# Altium PCB ultrasonic_revB.PcbDoc
Units mil, origin at the board's own origin, x right, y up, seen from the top; angles counter-clockwise.
Board outline 1840 x 1195 mil, 4 copper layers (Top Layer, Mid-Layer 1, Mid-Layer 2, Bottom Layer); 68 components, 51 nets, 270 pads, 100 vias.
Unrouted connection lines stored in the file: 2.
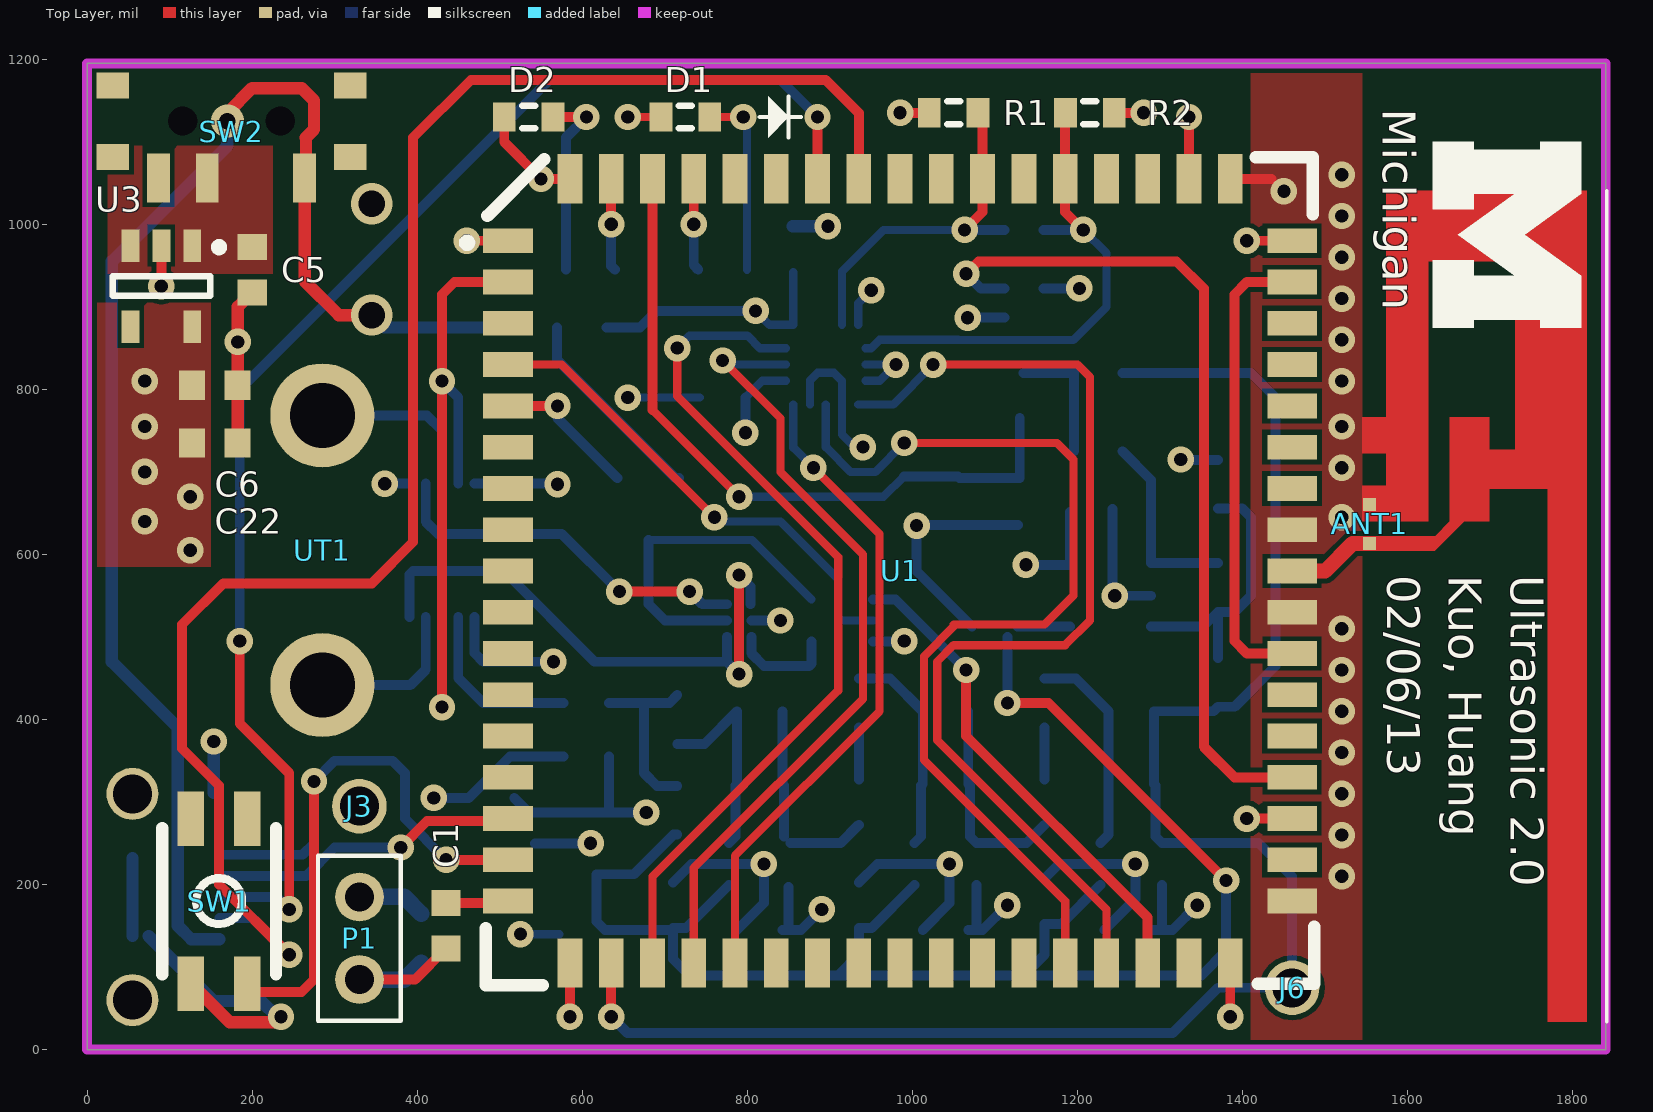
[diagram p0: Top Layer view]
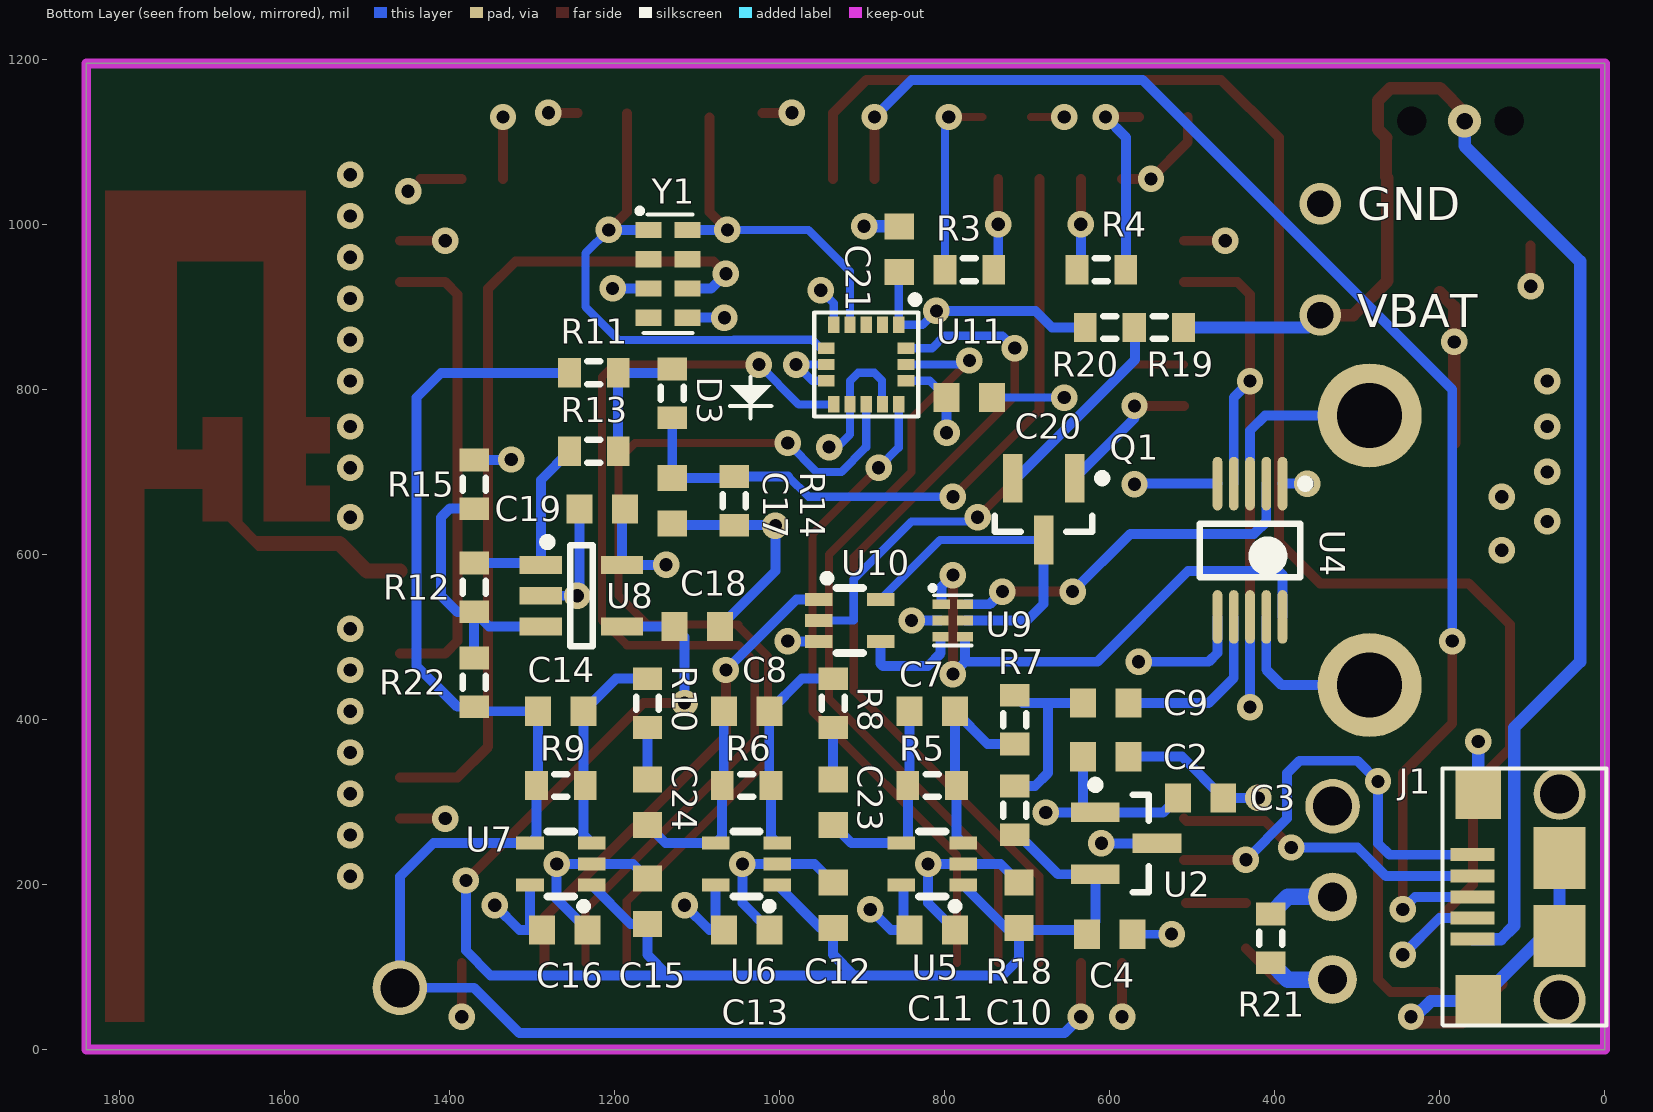
[diagram p1: Bottom Layer view, seen from below]
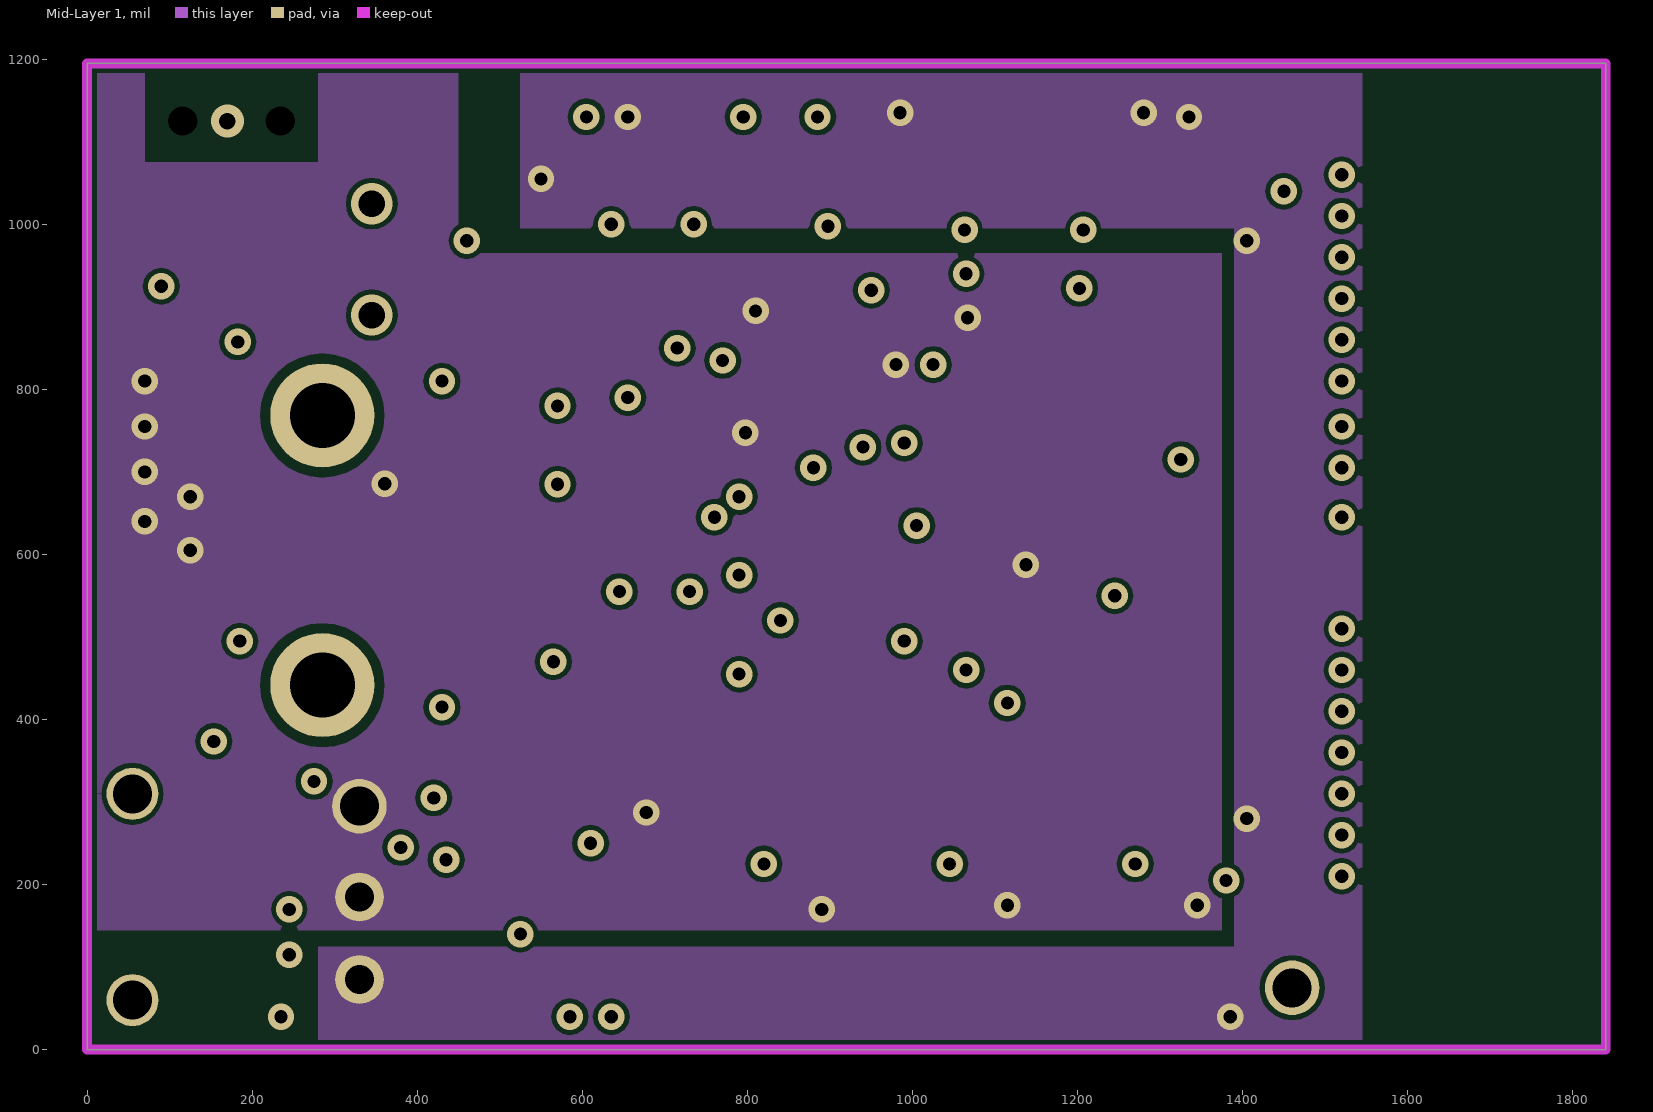
[diagram p2: Mid-Layer 1]
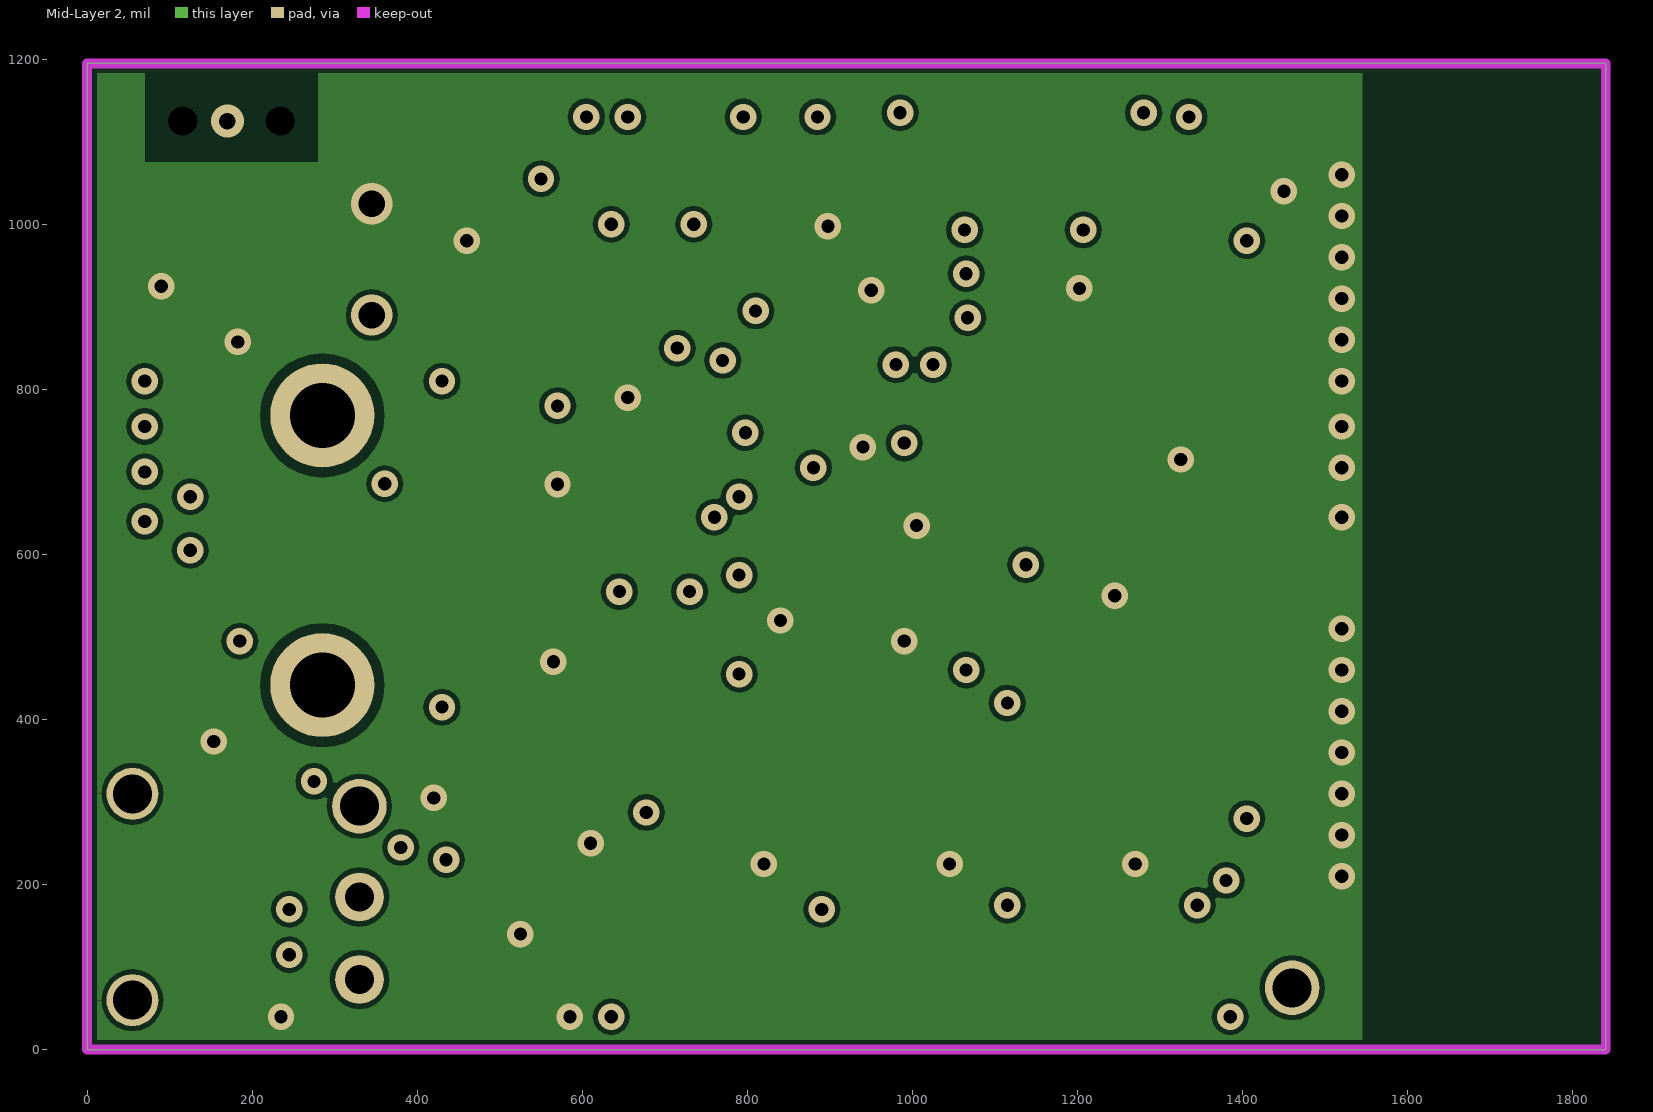
[diagram p3: Mid-Layer 2]

## Layer stack, top to bottom
Top Layer: signal copper 1.4
Dielectric: core 12.6, FR-4, Dk 4.8
Mid-Layer 1: signal copper 1.4
Dielectric: prepreg 12.6, FR-4, Dk 4.8
Mid-Layer 2: signal copper 1.4
Dielectric: core 12.6, FR-4, Dk 4.8
Bottom Layer: signal copper 1.4

## Board outline
0,0 1840,0 1840,1195 0,1195

## Design rules (kind name [scope] priority, off if disabled: settings)
Clearance "Clearance~Sunstone Circuits" [All] p1: gap=6 // Sunstone Circuits Minimum Clearance Rule (MLB~4&6 Layer Designs)
HoleSize "HoleSize~Sunstone Circuits" [All] p1: absolutevalues=TRUE maxlimit=251 minlimit=8 maxpercent=80.000 minpercent=20.000 // Sunstone Circuits Hole Size Rule (MLB~4&6 Layer Designs)
HoleSize Testpoint [All] p2: absolutevalues=TRUE maxlimit=100 minlimit=1 maxpercent=80.000 minpercent=20.000
HoleSize TestPointUsage [All] p3: absolutevalues=TRUE maxlimit=100 minlimit=1 maxpercent=80.000 minpercent=20.000
MinimumAnnularRing "MinimumAnnularRing~Sunstone Circuits" [All] p1: minimumring=7 // Sunstone Circuits Minimum Annular Ring (MLB~4&6 Layer Designs)
PlaneClearance "PlaneClearance~Sunstone Circuits" [All] p1: clearance=12 // Sunstone Circuits Power Plane Clearance Rule (MLB~4&6 Layer Designs)
PlaneConnect "PlaneConnect~Sunstone Circuits" [All] p1: planeconnectstyle=Relief reliefexpansion=10 reliefentries=4 reliefconductorwidth=8 reliefairgap=10 // Sunstone Circuits Power Plane Connect Rule (MLB~4&6 Layer Designs)
PolygonConnect "PolygonConnect~Sunstone Circuits" [All] p1: connectstyle=Direct reliefconductorwidth=8 reliefentries=4 polygonreliefangle="90 Angle" airgapwidth=10 // Sunstone Circuits Polygon Connect Style (MLB~4&6 Layer Designs)
RoomDefinition U_power [InComponentClass('U_power')] p1: confinementstyle=ConfineIn formatcopy=TRUE lockcomponents=FALSE outline -1.39,1013.57 -1.39,1241.3 351.39,1241.3 351.39,388.62 664.21,388.62 664.21,340.71 668.74,340.71 668.74,169.13 659.21,169.13 659.21,106.38 540.79,106.38 540.79,169.13 491.26,169.13 491.26,235.1 270.4,235.1 270.4,701.38 95.79,701.38 95.79,836.26 9.13,836.26 9.13,1013.57
RoomDefinition U_epic [InComponentClass('U_epic')] p2: confinementstyle=ConfineIn formatcopy=TRUE lockcomponents=FALSE outline -14.59,13.58 -14.59,356.42 440.47,356.42 440.47,1098.48 475.79,1098.48 475.79,1163.62 990.79,1163.62 990.79,1168.62 1109.21,1168.62 1274.21,1168.62 1274.21,1098.48 1504.47,1098.48 1504.47,1052.76 1853.03,1052.76 1853.03,21.73 209.23,21.73 209.23,13.58
RoomDefinition U_accelerometer [InComponentClass('U_accelerometer')] p3: confinementstyle=ConfineIn formatcopy=TRUE lockcomponents=FALSE outline 710.79,756.38 710.79,823.62 817.01,823.62 817.01,927.68 821.38,927.68 821.38,1029.21 888.62,1029.21 888.62,927.68 970.49,927.68 970.49,754.51 817.01,754.51 817.01,756.38
RoomDefinition U_ultrasonic_tx [InComponentClass('U_ultrasonic_tx')] p4 off: confinementstyle=ConfineIn formatcopy=TRUE lockcomponents=FALSE outline 589.29,566.26 589.29,743.74 760.87,743.74 760.87,590.12 982.13,590.12 982.13,465.63 847.87,465.63 847.87,477.13 752.59,477.13 752.59,566.26
RoomDefinition U_ultrasonic_rx [InComponentClass('U_ultrasonic_rx')] p5 off: confinementstyle=ConfineIn formatcopy=TRUE lockcomponents=FALSE outline 545.79,386.38 545.79,453.62 681.38,453.62 681.38,459.21 1086.38,459.21 1086.38,854.21 1153.62,854.21 1153.62,853.62 1284.21,853.62 1284.21,759.21 1358.62,759.21 1358.62,604.21 1398.62,604.21 1398.62,134.9 1520,134.9 1520,15.1 1400.4,15.1 1400.4,111.38 755.79,111.38 755.79,115.79 676.38,115.79 676.38,386.38
RoomDefinition U_ultrasonic [InComponentClass('U_ultrasonic')] p6 off: confinementstyle=ConfineIn formatcopy=TRUE lockcomponents=FALSE outline 19.59,341.12 19.59,870.91 550.4,870.91 550.4,341.12
RoutingVias "RoutingVias~Sunstone Circuits" [All] p1: holewidth=16 width=30 viastyle="Through Hole" minholewidth=8 minwidth=24 maxholewidth=20 maxwidth=40 // Sunstone Circuits Routing Vias Rule (MLB~4&6 Layer Designs)
ShortCircuit "ShortCircuit~Sunstone Circuits" [All] p1: allowed=FALSE // Sunstone Circuits Short Circuit Rule~Do Not Allow (MLB~4&6 Layer Designs)
SilkscreenOverComponentPads [All] p1: minsilkscreentomaskgap=10
SolderMaskExpansion "Tent Vias" [isVia] p1: expansion=-20 // Tent Vias
SolderMaskExpansion "SolderMaskExpansion~Sunstone Circuits" [All] p2: expansion=3 // Sunstone Circuits Solder Mask Expansion Rule (MLB~4&6 Layer Designs)
ViasUnderSMD "ViasUnderSMD~Sunstone Circuits" [All] p1: allowed=FALSE // Sunstone Circuits Vias Under SMD~Do Not Allow (MLB~4&6 Layer Designs)
Width "Width~Sunstone Circuits" [All] p1: maxlimit=100 minlimit=6 preferedwidth=10 // Sunstone Circuits Minimum Width Rule (MLB~4&6 Layer Designs)
23 further rules are at their usual default settings.

## Classes and differential pairs
component class U_accelerometer: C20 C21 U11
component class U_epic: ANT1 C1 D1 D2 J1 P1 R1 R2 R3 R4 R21 SW1 U1 Y1
component class U_power: C2 C3 C4 C5 C6 C22 J3 SW2 U2 U3
component class U_ultrasonic_rx: C7 C8 C9 C10 C11 C12 C13 C14 C15 C16 C17 C18 C19 C23 C24 D3 J6 R5 R6 R7 R8 R9 R10 R11 R12 R13 R14 R15 R18 R22 U5 U6 U7 U8
component class U_ultrasonic_tx: Q1 R19 R20 U9 U10
component class U_ultrasonic: U4 UT1

## Components (designator, comment, footprint, x,y, rotation, side; value= is the part's Value field where it differs from the comment)
ANT1 "2.4GHz PCB Antenna" "Inverted F Antenna" 1545,640 r270 top
C1 "Cap Semi" 1608[0603] 435,150 r90 top
C2 "Cap Semi" 1608[0603] 605,355 r0 bottom
C3 "Cap Semi" 1608[0603] 490,305 r0 bottom
C4 "Cap Semi" 1608[0603] 600,140 r0 bottom
C5 "Cap Semi" 1608[0603] 200,945 r90 top
C6 "Cap Semi" 1608[0603] 155,805 r180 top
C7 "Cap Semi" 1608[0603] 815,410 r180 bottom
C8 "Cap Semi" 1608[0603] 1040,410 r180 bottom
C9 "Cap Semi" 1608[0603] 605,420 r180 bottom
C10 "Cap Semi" 1608[0603] 710,175 r270 bottom
C11 "Cap Semi" 1608[0603] 815,145 r0 bottom
C12 "Cap Semi" 1608[0603] 935,175 r270 bottom
C13 "Cap Semi" 1608[0603] 1040,145 r0 bottom
C14 "Cap Semi" 1608[0603] 1265,410 r180 bottom
C15 "Cap Semi" 1608[0603] 1160,180 r270 bottom
C16 "Cap Semi" 1608[0603] 1260,145 r0 bottom
C17 "Cap Semi" 1608[0603] 1130,665 r270 bottom
C18 "Cap Semi" 1608[0603] 1099.84,512.6 r0 bottom
C19 "Cap Semi" 1608[0603] 1215,655 r180 bottom
C20 "Cap Semi" 1608[0603] 770,790 r0 bottom
C21 "Cap Semi" 1608[0603] 855,970 r270 bottom
C22 "Cap Semi" 1608[0603] 155,735 r180 top
C23 "Cap Semi" 1608[0603] 935,300 r90 bottom
C24 "Cap Semi" 1608[0603] 1160,300 r90 bottom
D1 "LED3" J1-0603 725,1130 r0 top
D2 "LED3" J1-0603 535,1130 r0 top
D3 "Diode" J1-0603 1130,795 r270 bottom
J1 "6 pin connector" "Micro USB" 55,185 r90 bottom
J3 "5004" TestPoint 330,295 r0 top
J6 "5004" TestPoint 1460,75 r0 top
P1 "1 x 2 header" "1x2 header" 330,135 r270 top
Q1 "ZXM61P03" SOT23-3N 680,655 r270 bottom
R1 "10K" J1-0603 1050,1135 r0 top
R2 "10K" J1-0603 1215,1135 r180 top
R3 "470" J1-0603 770,945 r0 bottom
R4 "470" J1-0603 610,945 r180 bottom
R5 "1Meg" J1-0603 815,320 r0 bottom
R6 "1Meg" J1-0603 1040,320 r0 bottom
R7 "100K" J1-0603 715,400 r270 bottom
R8 "100K" J1-0603 935,420 r90 bottom
R9 "1Meg" J1-0603 1265,320 r0 bottom
R10 "100K" J1-0603 1160,420 r90 bottom
R11 "2k" J1-0603 1225,820 r180 bottom
R12 "1.24M" J1-0603 1370,560 r270 bottom
R13 "2k" J1-0603 1225,725 r180 bottom
R14 "1Meg" J1-0603 1055,665 r90 bottom
R15 "422K" J1-0603 1370,685 r270 bottom
R18 "Res3" J1-0603 715,290 r270 bottom
R19 "Res3" J1-0603 540,875 r180 bottom
R20 "Res3" J1-0603 600,875 r0 bottom
R21 "Res3" J1-0603 405,135 r270 bottom
R22 "37.4K" J1-0603 1370,445 r90 bottom
SW1 "EVQP2" EVQP2 160,180 r270 top
SW2 "EG1218" "Slide Switch SPDT" 175,1125 r180 top
U1 "EPIC_COREA" EPIC_LCC68 985,580 r0 top locked
U2 "ISL60002" SOT23-3N 580,250 r180 bottom
U3 "ADP162" TSOT23-5 90,925 r270 top
U4 "TS3A24159" TSSOP50P490X110-10N 430,605 r270 bottom
U5 "MIC861" SC70-6 815,225 r90 bottom
U6 "MIC861" SC70-6 1040,225 r90 bottom
U7 "MIC861" SC70-6 1265,225 r90 bottom
U8 "AS1976" SOT23-5 1240,550 r180 bottom
U9 "NLX2G14" ULLGA6 790,520 r270 bottom
U10 "SN74AUP1G08" SC70-6 915,520 r270 bottom
U11 "LIS3DHTR" LGA-16 895,830 r270 bottom
UT1 "400EP250" "TRANSDUCER RECEPTICLE" 285,605 r90 top
Y1 "RV-4162-C7" RV4162 1135,940 r270 bottom

## Footprints (in the part's own frame and the unit in brackets; to place one, negate y for a bottom-side part, rotate by r counter-clockwise, add the part's x,y. Pads: shape width x height; smd on the part's side, far side on the other; paste and mask are expansions set on the pad)
"1x2 header" [mm] "1x2 header, 100 mils"
  round 1.5 hole 0.9: 1(-1.27,0) 2(1.27,0)
  silkscreen extent -2.54,-1.27 2.54,1.27, body extent -2.53,-1.26 2.53,1.26, height 8.38
1608[0603] [mm] "Chip Capacitor, Body 1.6x0.8mm, IPC High Density"
  rect 0.8x0.9 smd: 1(-0.7,0) 2(0.7,0)
  body extent -0.87,-0.48 0.87,0.48, height 1.3
EPIC_LCC68 [mil]
  rect 60x30 smd: 1(-475,400) 2(-475,350) 3(-475,300) 4(-475,250) 5(-475,200) 6(-475,150) 7(-475,100) 8(-475,50) 9(-475,0) 10(-475,-50) 11(-475,-100) 12(-475,-150) 13(-475,-200) 14(-475,-250) 15(-475,-300) 16(-475,-350) 17(-475,-400)
  rect 30x59.84 smd: 18(-400,-475) 19(-350,-475) 20(-300,-475) 21(-250,-475) 22(-200,-475) 23(-150,-475) 24(-100,-475) 25(-50,-475) 26(0,-475) 27(50,-475) 28(100,-475) 29(150,-475) 30(200,-475) 31(250,-475) 32(300,-475) 33(350,-475) 34(400,-475) 52(400,475) 53(350,475) 54(300,475) 55(250,475) 56(200,475) 57(150,475) 58(100,475) 59(50,475) 60(0,475) 61(-50,475) 62(-100,475) 63(-150,475) 64(-200,475) 65(-250,475) 66(-300,475) 67(-350,475) 68(-400,475)
  rect 59.84x30 smd: 35(475,-400) 36(475,-350) 37(475,-300) 38(475,-250) 39(475,-200) 40(475,-150) 41(475,-100) 42(475,-50) 43(475,0) 44(475,50) 45(475,100) 46(475,150) 47(475,200) 48(475,250) 49(475,300) 50(475,350) 51(475,400)
  silkscreen extent -530,-502 502,501, body extent -448,-448 448,453, height 118
EVQP2 [mm] "EVQP2 Switch"
  rect 1.68x0.81 smd: 1(-2.54,-0.87) 1(2.54,-0.87) 2(-2.54,0.87) 2(2.54,0.87)
  silkscreen extent -2.25,-1.75 2.25,1.75, body extent -2.25,-1.75 2.25,1.75, height 4
"Inverted F Antenna" [mm]
  rect 0.4x0.4 smd mask-20: GND(-0.525,0.225) SIG(0.675,0.225)
  Top Layer region: 0,0 0,2.03 -8,2.03 -8,4.7 -2.2,4.7 -2.2,3.9 -3.2,3.9 -3.2,2.69 0,2.69 0.45,2.24 0.45,0 0.91,0 0.91,2.23 0,3.14 0,3.9 -1,3.9 -1,5.7 15.4,5.7 15.4,6.91 -10.18,6.91 -10.18,0.74 -3.2,0.74 -3.2,0 -2.1,0 -2.1,0.74 -1.1,0.74 -1.1,0
  silkscreen extent -10.18,7.52 15.4,7.52
J1-0603 [mm] "Chip Resistor, Body 1.6x0.8mm, IPC High Density"
  rect 0.7x0.9 smd: 1(-0.75,0) 2(0.75,0)
  silkscreen extent -0.2,-0.35 0.2,0.35, body extent -0.85,-0.48 0.85,0.48, height 0.9
LGA-16 [mm]
  rect 0.51x0.345 smd mask+0.1: 1(-1.225,1) 2(-1.225,0.5) 3(-1.225,0) 4(-1.225,-0.5) 5(-1.225,-1) 9(1.225,-1) 10(1.225,-0.5) 11(1.225,0) 12(1.225,0.5) 13(1.225,1)
  rect 0.345x0.51 smd mask+0.1: 6(-0.5,-1.225) 7(0,-1.225) 8(0.5,-1.225) 14(0.5,1.225) 15(0,1.225) 16(-0.5,1.225)
  silkscreen extent -2.1,-1.6 1.6,1.6, body extent -1.5,-1.5 1.5,1.5, height 1
"Micro USB" [mm]
  rect 0.4x1.35 smd mask+0.1: 1(-1.3,2.675) 2(-0.65,2.675) 3(0,2.675) 4(0.65,2.675) 5(1.3,2.675)
  rect 1.6x1.4 smd mask+0.1: 6(-3.2,2.5) 6(3.2,2.5)
  rect 1.9x1.6 smd mask+0.1: 6(-1.2,0) 6(1.2,0)
  round 1.6 hole 1.2: ""(-3.175,0) ""(3.175,0)
  silkscreen extent -3.95,-1.45 3.95,3.6
RV4162 [mm] "RTC"
  rect 0.5x0.8 smd: 1(-1.35,-0.6) 2(-0.45,-0.6) 3(0.45,-0.6) 4(1.35,-0.6) 5(1.35,0.6) 6(0.45,0.6) 7(-0.45,0.6) 8(-1.35,0.6)
  silkscreen extent -1.97,-0.91 1.83,0.75, body extent -1.6,-0.75 1.6,0.75, height 0.8
SC70-6 [mm]
  rect 0.4x0.85 smd: 1(-0.65,-0.95) 2(0,-0.95) 3(0.65,-0.95) 4(0.65,0.95) 5(-0.65,0.95)
  silkscreen extent -1.4,-0.8 1,0.4, body extent -0.9,-0.6 0.9,0.6, height 0.8
"Slide Switch SPDT" [mm] "Surface mount, 3 position, right angle slide switch"
  rect 0.7x1.5 smd: 1(-2.25,1.75) 2(0.75,1.75) 3(2.25,1.75)
  rect 1x0.8 smd: ""(-3.65,-1.1) ""(-3.65,1.1) ""(3.65,-1.1) ""(3.65,1.1)
  round 0 hole 0.9: ""(-1.5,0) ""(1.5,0)
  body extent -3.35,-2.7 3.35,1.3, height 1.4
SOT23-3N [mm] "SOT23, 3-Leads, Body 2.9x1.3mm, Pitch 0.95mm, Lead Span 2.5mm, IPC Medium Density"
  rect 1.5x0.6 smd: 1(-0.95,0.95) 2(-0.95,-0.95) 3(0.95,0)
  silkscreen extent -1.07,-1.5 0.7,1.92, body extent -0.7,-1.5 0.7,1.5, height 1.1
SOT23-5 [mm] "SOT23, 5-Leads, Body 2.9x1.6mm, Pitch 0.95mm, Lead Span 2.8mm, IPC High Density"
  rect 1.3x0.55 smd: 1(-1.25,0.95) 2(-1.25,0) 3(-1.25,-0.95) 4(1.25,-0.95) 5(1.25,0.95)
  silkscreen extent -1.18,-1.55 0.35,1.77, body extent -0.67,-1.5 0.65,1.5, height 1.45
TestPoint [mm]
  round 1.68 hole 1.2: 1(0,0)
  body extent -1.26,-1.27 1.27,1.27, height 4.57
"TRANSDUCER RECEPTICLE" [mm] "Transducer with Pin Recepticle"
  round 3.2 hole 2: 1(-4.15,0) 2(4.15,0)
  body extent -6.45,-6.49 6.5,6.49, height 14
TSOT23-5 [mm] "SOT23, 6-Leads, Body 3.0x2.9mm (max), Pitch 0.95mm, IPC Medium Density"
  rect 1x0.55 smd: 1(-1.25,0.95) 2(-1.25,0) 3(-1.25,-0.95) 4(1.25,-0.95) 5(1.25,0.95)
  silkscreen extent -1.32,-1.5 0.3,1.9, body extent -0.87,-1.5 0.87,1.5, height 1
TSSOP50P490X110-10N [mm] "TSSOP, 10-Leads, Body 3.1x3.1mm (max), Pitch 0.50mm, IPC Medium Density"
  oval 1.65x0.3 smd: 1(-2.05,1) 2(-2.05,0.5) 3(-2.05,0) 4(-2.05,-0.5) 5(-2.05,-1) 6(2.05,-1) 7(2.05,-0.5) 8(2.05,0) 9(2.05,0.5) 10(2.05,1)
  silkscreen extent -2.17,-1.55 0.82,1.82, body extent -1.55,-1.55 1.55,1.55, height 1.1
ULLGA6 [mm] "ULLGA6 1.45x1.0, 0.5P  CASE 613AF"
  rect 0.3x0.53 smd: 1(-0.5,-0.355)
  rect 0.3x0.49 smd: 2(0,-0.375) 3(0.5,-0.375) 4(0.5,0.375) 5(0,0.375) 6(-0.5,0.375)
  silkscreen extent -1.02,-0.65 0.77,0.58, body extent -0.72,-0.5 0.72,0.5, height 0.4

## Part data
C1 C2 C3 C4 C5 C6 C7 C8 C9 C10 C11 C12 C13 C14 C15 C16 C17 C18 C19 C20 C21 C22 C23 C24: "Capacitor (Semiconductor SIM Model)"
D1 D2: "Typical BLUE SiC LED"
D3: "Default Diode"
J3 J6: library part TestPoint, "TEST POINT PC MINI .040\"D YELLOW"
P1: "100 mils standard header"
Q1: "30V P-CHANNEL ENHANCEMENT MODE MOSFET"
R1 R2 R3 R4 R5 R6 R7 R8 R9 R10 R11 R12 R13 R14 R15 R22: library part Res3, "Resistor"
R18 R19 R20 R21: "Resistor"
SW1: "Switch"
SW2: "Switch 3 Pos"
U1: "EPIC Core"
U2: "Precision Low Power FGA? Voltage References"
U3: "Ultralow Quiescent Current,  150 mA, CMOS Linear Regulators"
U4: "DUAL-CHANNEL 2:1 MULTIPLEXER/DEMULTIPLEXER"
U5 U6 U7: "Teeny, Ultra Low Power Op Amp"
U8: "Ultra-Low Current, 1.8V Comparators"
U9: "Dual Schmitt-Trigger  Inverter"
U10: "LOW-POWER SINGLE 2-INPUT POSITIVE-AND GATE"
U11: "MEMS digital output motion sensor"
UT1: library part Tranducer, "Air Ultrasounic Ceramic Transducers"
Y1: "Real Time Clock Module with I2C Bus"

## Via types
v1: diameter 32, hole 16, Top Layer to Bottom Layer, 97 vias
v2: diameter 50, hole 32, Top Layer to Bottom Layer, 2 vias
v3: diameter 40, hole 20, Top Layer to Bottom Layer, 1 vias

## Nets (pads, with @x,y where several pads share a name; then routed paths per layer and width w, separated by ;. In a path a pad name is that pad's centre, name@x,y a point inside that pad or via, vN(x,y) a via of type N, cw(c..) or ccw(c..) an arc to the next point about the centre after c; other vN are vias at no path point)
ACCE_ADC1: U1.20 U11.16 | length 1063.3
  Top Layer w10: U1.20 685,210 910,435 910,596.82 715,791.82 v1(715,850)
  Bottom Layer w10: v1(715,850) 730,865 800,865 815.32,849.68 U11.16
ACCE_ADC2: U1.21 U11.15 | length 963.3
  Top Layer w10: U1.21 735,220 940,425 940,600 840,700 840,765 v1(770,835)
  Bottom Layer w10: v1(770,835) v1@774.39,830.61 ; v1@775,830 U11.15
ACCE_ADC3: U1.22 U11.13 | length 792.5
  Top Layer w10: U1.22 785,235 960,410 960,625 v1(880,705)
  Bottom Layer w10: U11.13 855.63,729.37 v1(880,705)
ACCE_INT1: U1.30 U11.11 | length 1206.7
  Top Layer w10: v1(990,735) 1175,735 1195,715 1195,550 1160,515 1050,515 1050,512.63 1014,476.63 1014,351 1185,180 U1.30
  Bottom Layer w10: 895,730 U11.11 ; 896.18,730 896.18,728.82 925,700 955,700 v1(990,735)
ACCE_INT2: U1.31 U11.9 | length 1257.4
  Top Layer w10: v1(1025,830) 1200,830 1215,815 1215,520 1185,490 1050,490 1030,470 1030,375 1235,170 U1.31
  Bottom Layer w10: U11.9 976.77,781.77 v1(1025,830)
AMP1_OUT: C7.1 C23.1 R5.2 U5.4 | length 241.2
  Bottom Layer w12: R5.2@842.56,321.97 C7.1 ; 844.53,258.46 R5.2 ; U5.4 913.15,250.59 C23.1
AMP2_OUT: C8.1 C24.1 R6.2 U6.4 | length 252.4
  Bottom Layer w12: R6.2@1067.56,321.97 C8.1 ; R6.2 1069.53,258.46 U6.4 1138.15,250.59 C24.1
AMP3_OUT: C14.1 J6.1 R9.2 R11.1 R22.1 U1.19 U7.4 | length 2087.1
  Top Layer w12: v1(635,40) U1.19
  Bottom Layer w12: v1(635,40) 655,20 1315,20 1370,75 J6.1 1460,210 1419.41,250.59 U7.4 1294.53,258.46 R9.2 1292.56,321.97 C14.1 1364.53,410 R22.1 1390.47,415.47 1440,465 1440,790 1410,820 R11.1
COMP_OUT: R12.1 R13.1 U8.1 | length 228.5
  Bottom Layer w12: R13.1 1289.21,690.32 U8.1@1289.21,589.53 ; U8.1@1291.34,589.53 R12.1
GND: ANT1.GND C2.1 C3.1 C4.1 C5.1 C6.1 C10.1 C11.1 C12.1 C13.1 C15.1 C16.1 C17.2 C18.1 C19.1 C20.1 C21.1 C22.1 J1.6 R14.1 R15.1 SW1.1 U1.1 U1.18 U1.35 U1.42 U1.44 U1.52 U2.3 U3.2 U4.5 U4.6 U5.2 U6.2 U7.2 U8.2 U9.2 U10.3 U11.5 U11.10 U11.12 Y1.3 | length 2991
  Top Layer w12: v1(90,925) U3.2 ; v1(460,980) U1.1 ; v1(585,40) U1.18 ; U1.52 1435,1055
  Top Layer w15: SW1.1@125.75,80 126.14,80 172.72,33.43 228.43,33.43 v1(235,40) ; C22.1 C6.1 v1(182.56,857.44) 182.56,900 C5.1
  Bottom Layer w10: v1(525,140) C4.1 ; v1(655,790) C20.1 ; U11.12@875.91,781.77 875.91,810.91 885,820 905,820 914.68,810.32 U11.10 914.68,745.32 v1@930,730 ; U11.5 934.37,904.37 v1(950,920)
  Bottom Layer w12: v1(420,305) C3.1 512.44,355 C2.1 ; U4.6 469.37,480.63 480,470 v1(565,470) ; U4.5 569.29,685.71 v1(570,685) ; U2.3 v1(610,250) ; C10.1 732.44,225 U5.2 v1(820,225) 820,177.56 C11.1 ; U9.2 v1(840,520) ; C12.1 957.44,225 U6.2 v1(1045,225) 1045,177.56 C13.1 ; U10.3 989.41,494.41 v1(990,495) ; v1(1005,635) 1005,579.88 C18.1 ; v1@1005.47,635.47 R14.1 C17.2@1128.03,635.47 ; Y1.3 v1(1202.28,922.28) ; C15.1 1177.44,225 U7.2 v1(1270,225) 1270,182.56 C16.1 ; v1@1242.56,552.44 C19.1 ; v1(1245,550) U8.2 ; v1(1325,715) 1325.47,714.53 R15.1
  Bottom Layer w15: J1.6@55,137.76 J1.6@55,232.24 ; J1.6@74.68,137.76 153.43,59.02 210.98,59.02 230,40 v1(235,40) ; J1.6@153.43,310.98 v1(153.43,373.43) ; C21.1 v1(897.56,997.56)
  other v1: 1520,210 1520,260 1520,310 1520,360 1520,410 1520,460 1520,510 1520,645 1520,705 940,730 1520,755 1520,810 1520,860 1520,910 1520,960 1520,1010 1450,1040 1520,1060
  other v2: 345,1025
NetANT1_SIG: ANT1.SIG U1.43 | length 106.6
  Top Layer w18.07: U1.43 1500,580 1533.23,613.23 ANT1.SIG@1552.87,613.23
NetC1_2: C1.2 U1.17 | length 72.6
  Top Layer w12: C1.2 U1.17@507.56,177.56
NetC7_2: C7.2 R5.1 R7.2 U5.3 | length 252.3
  Bottom Layer w12: R7.2 747.91,370.47 C7.2 787.44,321.97 R5.1 785.47,258.46 U5.3
NetC8_2: C8.2 R6.1 R8.2 U6.3 | length 257.3
  Bottom Layer w12: R8.2 972.91,449.53 C8.2 1012.44,321.97 R6.1 1010.47,258.46 U6.3
NetC9_1: C9.1 R7.1 R18.1 | length 217.8
  Bottom Layer w12: C9.1 675,420 ; R18.1 690.47,319.53 675,335 675,420 ; R7.1 705.47,420 675,420
NetC14_2: C14.2 R9.1 R10.2 U7.3 | length 254.5
  Bottom Layer w12: R10.2 1197.91,449.53 C14.2 1237.44,260.43 ; U7.3 1235.47,258.46
NetC17_1: C17.1 D3.2 R14.2 U1.66 | length 852.4
  Top Layer w10: 685,775 v1(790,670)
  Top Layer w12: 685,775 U1.66
  Bottom Layer w10: v1(790,670) 965,670 989.53,694.53
  Bottom Layer w12: 989.53,694.53 R14.2 1056.97,692.56 C17.1 D3.2
NetC23_2: C23.2 R8.1 | length 62.9
  Bottom Layer w12: C23.2 R8.1
NetC24_2: C24.2 R10.1 | length 62.9
  Bottom Layer w12: C24.2 R10.1
NetD1_2: D1.2 R3.2 | length 227.3
  Top Layer w10: D1.2 v1(795,1130)
  Bottom Layer w10: v1(795,1130) 799.53,1125.47 R3.2
NetD2_2: D2.2 R4.2 | length 235.6
  Top Layer w12: D2.2 v1(605,1130)
  Bottom Layer w12: R4.2 580.47,1105.47 v1(605,1130)
NetD3_1: D3.1 R11.2 R13.2 | length 155.9
  Bottom Layer w12: D3.1@1134.53,820 R11.2 R13.2
NetQ1_2: Q1.2 R19.1 R20.1 | length 246.4
  Bottom Layer w12: R19.1 569.53,835.87 713,692.4 Q1.2
NetR3_1: R3.1 U1.65 | length 112.3
  Top Layer w12: v1(735,1000) U1.65
  Bottom Layer w12: v1(735,1000) 735,950.47 R3.1
NetR4_1: R4.1 U1.67 | length 111.9
  Top Layer w12: v1(635,1000) U1.67
  Bottom Layer w12: v1(635,1000) 635,949.53 R4.1
NetR12_2: R12.2 R15.2 R22.2 U8.3 | length 331.6
  Bottom Layer w12: U8.3 1352.13,512.6 R12.2 ; R22.2 R12.2 ; R15.2 1399.53,655.47 1410,645 1410,550 1390.47,530.47 R12.2
NetU1_4: U1.4 U10.2 | length 600.1
  Top Layer w10: U1.4 575,830 v1(760,645)
  Bottom Layer w10: v1(760,645) 765,640 840,640 910,570 910,520 U10.2
NetU4_3: U4.3 UT1.2 | length 216.9
  Bottom Layer w12: UT1.2 411.61,768.39 430,750 U4.3
NetU4_9: U4.9 UT1.1 | length 197
  Bottom Layer w12: UT1.1 391.61,441.61 410.31,460.31 U4.9
NetU9_3: U9.3 U10.4 | length 127.1
  Bottom Layer w12: U9.3 804.76,480.24 820,465 875,465 877.6,467.6 U10.4
OP1_NEGIN: C9.2 U4.7 | length 214.3
  Bottom Layer w12: U4.7 449.68,450.32 480,420 C9.2
PWM: U1.32 U10.1 | length 594.2
  Top Layer w12: v1(1065,460) 1065,380 1285,160 U1.32
  Bottom Layer w12: U10.1 979.41,545.59 v1(1065,460)
R\S\T: J1.5 SW1.2 U1.16 | length 839.6
  Top Layer w12: SW1.2@204.25,70 260,70 275,85 v1(275,325) ; v1(435,230) U1.16
  Bottom Layer w12: J1.5 261.18,236.18 275,250 v1(275,325) 300,350 370,350 385,335 385,280 v1(435,230)
R\T\C\_\I\N\T\: U1.38 Y1.6 | length 1038.9
  Top Layer w12: v1(1065,940) 1080,955 1320,955 1353,922 1353,367 1390,330 U1.38
  Bottom Layer w12: v1(1065,940) 1082.72,922.28 Y1.6
SCL: R1.2 U1.58 U11.4 Y1.8 | length 427.7
  Top Layer w12: v1(1063.15,993.15) 1085,1015 U1.58 R1.2@1085,1129.53
  Bottom Layer w10: U11.4 914.68,943.02 964.81,993.15 v1(1063.15,993.15)
  Bottom Layer w12: v1(1063.15,993.15) Y1.8
SDA: R2.2 U1.56 U11.6 Y1.1 | length 616.2
  Top Layer w12: R2.2@1185,1134.53 U1.56 1185,1015 v1(1206.85,993.15)
  Bottom Layer w10: U11.6 949.68,849.68 960,860 1055.52,860 1055.67,859.85 1194.85,859.85 1235,900 1235,965 v1(1206.85,993.15)
  Bottom Layer w12: Y1.1 v1(1206.85,993.15)
SFD: U1.41 U1.50 | length 572.4
  Top Layer w12: U1.41 1405,480 1390,495 1390,915 1405,930 U1.50
SO: U1.57
T\X\_\G\A\T\E\: Q1.1 U1.5 | length 177.7
  Top Layer w12: U1.5 v1(570,780)
  Bottom Layer w12: v1(570,780) 570,765 Q1.1
TCK: J1.4 U1.15 | length 378.4
  Top Layer w12: v1(380,245) 412,277 507,277 U1.15
  Bottom Layer w12: J1.4 265.59,210.59 300,245 v1(380,245)
TX/RX_SELECT: U1.2 U4.4 U4.8 | length 827.9
  Top Layer w12: v1(430,415) v1(430,810) 430,915 445,930 U1.2
  Bottom Layer w12: v1(430,415) U4.8 ; v1(430,810) 449.68,790.32 U4.4
TX_1: U4.2 U9.6 | length 452.4
  Top Layer w12: v1(645,555) v1(730,555)
  Bottom Layer w12: U4.2 410.31,639.69 425,625 575,625 v1(645,555) ; v1(730,555) 745.32,539.68 U9.6
TX_2: U4.10 U9.1 U9.4 | length 696
  Top Layer w12: v1(790,455) v1(790,575)
  Bottom Layer w12: U4.10 390.63,575.63 395,580 505,580 615,470 775,470 775.24,469.76 ; U9.4 775.24,469.76 ; v1(790,455) 775.24,469.76 ; v1(790,575) 803.98,561.02 U9.1
UART1_RX: J1.3 U1.62 | length 1694.7
  Top Layer w12: v1(185,495) 185,395 245,335 v1(245,170) ; U1.62 v1(885,1130)
  Bottom Layer w12: J1.3 230,185 v1(245,170) ; v1(185,495) 185,800 560,1175 840,1175 v1(885,1130)
UART1_TX: J1.2 U1.61 | length 2033.9
  Top Layer w12: v1(245,115) 160,200 160,320 115,365 115,515 165,565 345,565 395,615 395,1105 465,1175 895,1175 935,1135 U1.61
  Bottom Layer w12: J1.2 200.59,159.41 v1(245,115)
VBAT: J1.1 R19.2 SW2.1 | length 1750.7
  Top Layer w15: v3(170,1125) 170,1135 200,1165 260,1165 275,1150 275,1115 265.27,1105.27 ; 265,1105 265.27,1105.27 ; v2(345,890) 305,890 263.58,931.42 SW2.1 265.27,1057.79 265.27,1105.27
  Bottom Layer w15: J1.1 126.18,133.82 110,150 110,390 30,470 30,955 170,1095 v3(170,1125) ; v2(345,890) 360,875 R19.2
VCC3.3: C2.2 C3.2 C6.2 C11.2 C13.2 C16.2 C19.2 C20.2 C21.2 C22.2 J3.1 P1.1 R20.2 R21.1 U2.1 U3.5 U4.1 U5.5 U6.5 U7.5 U8.5 U11.1 U11.7 U11.8 U11.14 Y1.5 | length 1343.2
  Bottom Layer w10: C20.2 817.87,810.32 U11.14 ; v1(810,895) 826.77,878.23 U11.1 C21.2@855.63,941.81 ; U11.8 960.32,810.32 v1(980,830) U11.7
  Bottom Layer w12: v1(360.71,685.71) U4.1 ; C3.2 535.16,287.4 U2.1 v1(677.6,287.4) ; R20.2 670,875 690,895 v1(810,895) ; U2.1@632.56,289.84 C2.2 ; v1(797.56,747.44) C20.2 ; C11.2 C11.2@850,145 ; U5.5@850,197.01 C11.2@850,145 ; v1(890,170) 865,145 C11.2@850,145 ; v1(1066.85,886.85) Y1.5 ; C13.2 C13.2@1077.4,145 ; U6.5 C13.2@1077.4,145 ; v1(1115,175) 1085,145 C13.2@1077.4,145 ; v1(1137.4,587.4) U8.5 C19.2@1190.79,651.65 ; C16.2 C16.2@1302.4,145 ; U7.5 C16.2@1302.4,145 ; v1(1345,175) 1315,145 C16.2@1302.4,145
  Bottom Layer w20: P1.1 384.53,185 R21.1
  other v1: 125,605 70,640 125,670 70,700 70,755 70,810
VCC3.3_EPIC: C1.1 D1.1 D2.1 P1.2 R1.1 R2.1 R21.2 U1.34 U1.37 U1.51 U1.53 U1.68 | length 693.8
  Top Layer w10: v1(655,1130) D1.1
  Top Layer w12: P1.2 397.56,85 C1.1 ; D2.1 505.47,1099.53 v1(550,1055) U1.68 ; v1(985,1135) R1.1 ; R2.1 v1(1280,1135) ; U1.53 v1(1335,1130) ; v1(1385,40) U1.34 ; v1(1405,280) U1.37 ; v1(1405,980) U1.51
  Bottom Layer w20: P1.2 384.53,85 R21.2
VCC_GATE: Q1.3 U9.5 U10.5 | length 408.5
  Bottom Layer w10: Q1.3 805.59,617.6 U10.5
  Bottom Layer w12: Q1.3 680,540 700,520 U9.5
VREF: C4.2 C10.2 C12.2 C15.2 C18.2 R18.2 U2.2 U5.1 U6.1 U7.1 U8.4 | length 1985.9
  Top Layer w12: v1(1115,420) 1165,420 v1(1380,205)
  Bottom Layer w12: C10.2@707.52,144.96 627.6,144.96 617.4,155.16 U2.2 662.6,212.6 710.47,260.47 R18.2 ; U5.1 725.63,147.44 C10.2 710,110 730,90 910,90 ; U6.1 950.63,147.44 C12.2 935,115 910,90 ; v1(1115,420) C18.2@1115,500.2 ; C18.2 U8.4 ; U7.1 1180.63,152.44 C15.2 1160,115 1135,90 ; v1(1380,205) 1380,120 1350,90 1135,90 ; 910,90 1135,90
VSUPPLY: C5.2 SW2.2 U3.1 U3.3
pads on no net: J1. SW2. SW2.3 U1.3 U1.6 U1.7 U1.8 U1.9 U1.10 U1.11 U1.12 U1.13 U1.14 U1.23 U1.24 U1.25 U1.26 U1.27 U1.28 U1.29 U1.33 U1.36 U1.39 U1.40 U1.45 U1.46 U1.47 U1.48 U1.49 U1.54 U1.55 U1.59 U1.60 U1.63 U1.64 U3.4 U11.2 U11.3 Y1.2 Y1.4 Y1.7

## Polygon pours and split planes (outlines as drawn)
GND on Top Layer "Top Layer-No Net" (solid, remove dead copper, pour order 6): 1545,0 1545,1195 1410,1195 1410,0
VSUPPLY on Top Layer "Top Layer-No Net" (solid, pour order 14): 25,940 225,940 225,1095 25,1095
VCC3.3 on Top Layer "Top Layer-No Net" (solid, pour order 16): 150,905 150,777 150,585 0,585 0,905
VCC3.3_EPIC on Mid-Layer 1 "Top Layer-No Net" (solid, pour order 12): 280,125 1390,125 1390,995 525,995 525,1195 1545,1195 1545,0 280,0
VCC3.3 on Mid-Layer 1 "Top Layer-No Net" (solid, pour order 10): 0,1195 70,1195 70,1075 280,1075 280,1195 450,1195 450,965 1375,965 1375,145 0,145
GND on Mid-Layer 2 "Top Layer-No Net" (solid, pour order 4): 1545,0 1545,1195 280,1195 280,1075 70,1075 70,1195 0,1195 0,0

## Keep-outs
Keep-Out Layer:
  the board outline again, w12

## Silkscreen, mask and mechanical layers (free items; w line width, h text height)
Top Overlay:
  region: 1630.31,1100 1630.31,1018.04 1680.14,1018.04 1680.14,1037.15 1729.43,1037.15 1660.76,987.31 1729.43,937.47 1680.14,937.47 1680.14,956.58 1630.31,956.58 1630.31,874.62 1680.14,874.62 1680.14,884.31 1760.72,884.31 1760.72,874.62 1810,874.62 1810,937.75 1741.89,987.31 1810,1036.87 1810,1100 1760.72,1100 1760.72,1090.31 1680.14,1090.31 1680.14,1100
  region: 825,1155 825,1105 850,1130
  lines w5: 815,1130 825,1130 ; 850,1105 850,1155 ; 850,1130 865,1130
  text "Michigan" at 1570,1140 h40 r270
  text "02/06/13" at 1575,575 h40 r270
  text "Kuo, Huang" at 1650,575 h40 r270
  text "Ultrasonic 2.0" at 1725,575 h40 r270
Bottom Overlay:
  region: 1010,805 1060,805 1035,780
  lines w5: 1010,780 1060,780 ; 1035,765 1035,780 ; 1035,805 1035,815
  text "GND" at 300,1005 h40
  text "VBAT" at 300,875 h40